# Altium PCB pro.PcbDoc
Units mil, origin at the board's own origin, x right, y up, seen from the top; angles counter-clockwise.
Board outline 6000 x 4000 mil, 2 copper layers (Top, Bottom), stack 12.7 mil thick; 1 components, 0 nets, 14 pads, 0 vias.
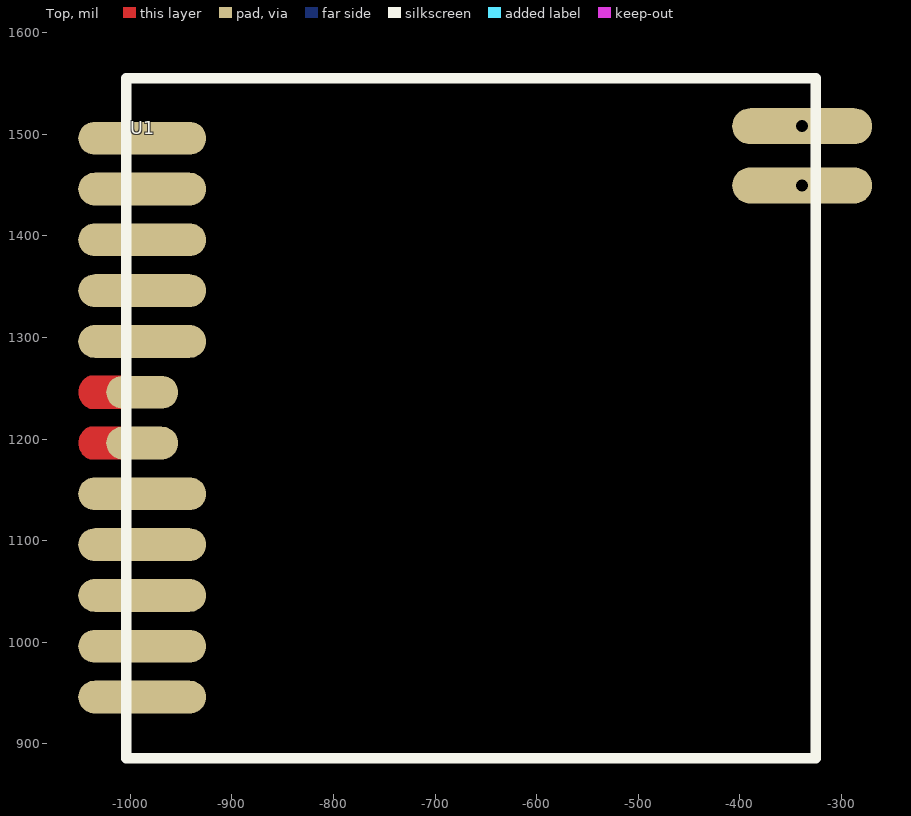
[diagram p0: Top view]
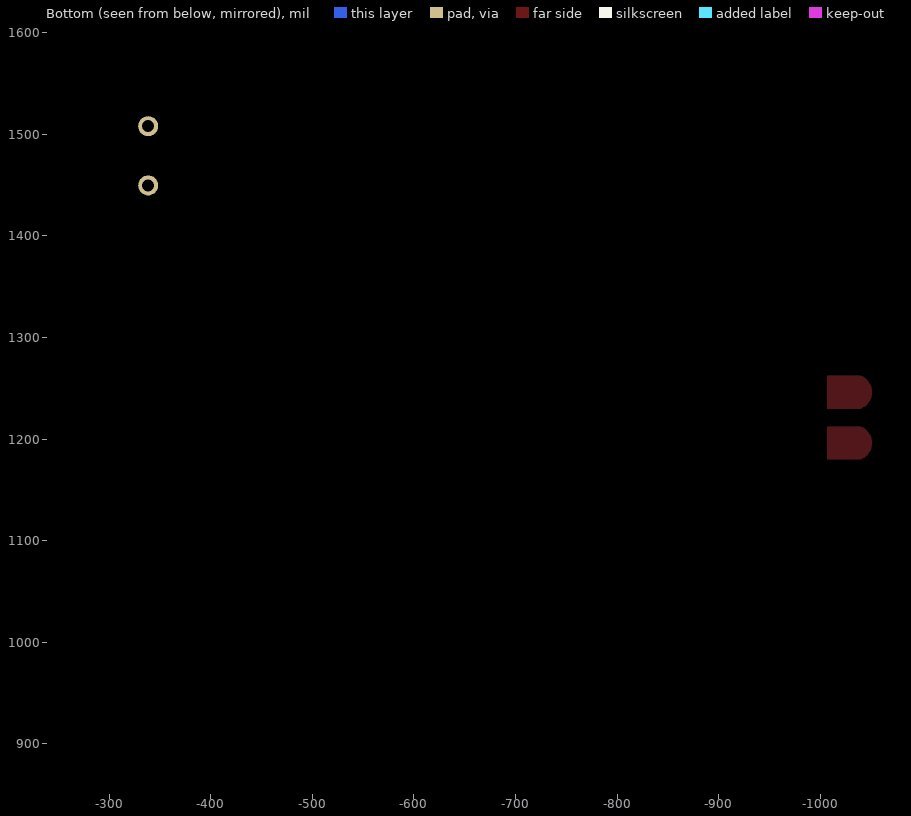
[diagram p1: Bottom view, seen from below]

## Layer stack, top to bottom
Solder Mask Top: solder mask 0.4, Solder Resist, Dk 3.5
Top: signal copper 1.35
Dielectric 1: dielectric 10, FR-4, Dk 4.3
Bottom: signal copper 1.35
Solder Mask Bottom: solder mask 0.4, Solder Resist, Dk 3.5

## Board outline
-9000,-9000 -3000,-9000 -3000,-5000 -9000,-5000

## Design rules (kind name [scope] priority, off if disabled: settings)
Clearance "Clearance - Default - DEFAULT- SMD" [IsVia vs IsSMTPin] p1: gap=6 ignorepadtopadclearanceinfootprint=FALSE
Clearance "Clearance - Default - DEFAULT - Via" [IsVia vs IsVia] p2: gap=6 ignorepadtopadclearanceinfootprint=FALSE
Clearance "Clearance - Default - DEFAULT - Net" [All] p3: gap=6 ignorepadtopadclearanceinfootprint=FALSE except(0: Arc-Hole Track-Hole SMDPad-Hole THPad-Hole Via-Hole Fill-Hole Poly-Hole Region-Hole Text-Hole; 10: Fill-Fill Fill-Poly Fill-Region Poly-Poly Poly-Region Region-Region Text-Text)
ComponentClearance "ComponentClearance - Default - DEFAULT" [All] p1: gap=6 collisioncheckmode=3 verticalgap=10 showdistances=FALSE
FanoutControl Fanout_Small [(CompPinCount < 5)] p3: bgadir=Out bgaviamode=Centered fanoutstyle=Auto fanoutdirection=OutThenIn viagrid=1 // Fanout_Small (Default Rule)
FanoutControl Fanout_SOIC [IsSOIC] p4: bgadir=Out bgaviamode=Centered fanoutstyle=Auto fanoutdirection=Alternating viagrid=1 // Fanout_SOIC (Default Rule)
HoleToHoleClearance "HoleToHoleClearance - Default - DEFAULT" [All] p1: gap=6 allowstackedmicrovias=TRUE
Length "Default Length" [All] p1: maxlimit=50000 minlimit=0
MaxMinImpedance "Default Impedance" [All] p1: minimum=50,00 maximum=150,0
ParallelSegment "Default Parallel Segment Adjasent" [All] p1: limit=1000 gap=200
ParallelSegment "Default Parallel Segment Same Layer" [All] p2: limit=1000 gap=200
PlaneConnect "Default PlaneConnect" [All] p1: planeconnectstyle=Relief reliefexpansion=20 reliefentries=0 reliefconductorwidth=15 reliefairgap=10
PolygonConnect "PolygonConnect - Default SMT" [IsSMTPin] p1: connectstyle=Relief reliefconductorwidth=10 reliefentries=4 polygonreliefangle="45 Angle" airgapwidth=10
PolygonConnect "PolygonConnect - Default Pad" [All] p2: connectstyle=Relief reliefconductorwidth=15 reliefentries=4 polygonreliefangle="45 Angle" airgapwidth=10
RoutingLayers "RoutingLayers - Default - DEFAULT" [All] p1: top layer_v5=TRUE bottom layer_v5=TRUE
RoutingPriority "RoutingPriority - Default - DEFAULT" [All] p1: routingpriority=3
RoutingTopology "Default Routing Topology" [All] p1: topology=Shortest
RoutingVias "RoutingVias - Default - DEFAULT" [All] p1: holewidth=37 width=55 viastyle="Through Hole" minholewidth=37 minwidth=55 maxholewidth=37 maxwidth=55
SMDToCorner "SMDToCorner - Default - DEFAULT" [All] p1: distance=60000
SolderMaskExpansion [All] p1: expansion=4
Width "Default Width" [All] p1: maxlimit=12 minlimit=12 preferedwidth=12
20 further rules are at their usual default settings.

## Components (designator, comment, footprint, x,y, rotation, side; value= is the part's Value field where it differs from the comment)
U1 "RF4432PRO" RF4432PRO -1000,1500 r0 top

## Footprints (in the part's own frame and the unit in brackets; to place one, negate y for a bottom-side part, rotate by r counter-clockwise, add the part's x,y. Pads: shape width x height; smd on the part's side, far side on the other; paste and mask are expansions set on the pad)
RF4432PRO [mm]
  oval 3.2x0.82 smd: 1(0.3,-0.1) 2(0.3,-1.37) 3(0.3,-2.64) 4(0.3,-3.91) 5(0.3,-5.18) 8(0.3,-8.99) 9(0.3,-10.26) 10(0.3,-11.53) 11(0.3,-12.8) 12(0.3,-14.07)
  oval 1.8x0.82 smd: 6(0.3,-6.45) 7(0.3,-7.72)
  oval 3.5x0.9 / inner round 0 / far side round 0.5 hole 0.3: 13(16.8,-1.28) 14(16.8,0.2)
  Top region: -0.17,-7.31 -1.01,-7.31 -1.04,-7.323 -1.069,-7.339 -1.097,-7.356 -1.124,-7.376 -1.149,-7.397 -1.172,-7.42 -1.194,-7.445 -1.213,-7.472 -1.231,-7.5 -1.246,-7.529 -1.259,-7.559 -1.27,-7.59 -1.279,-7.622 -1.285,-7.654 -1.288,-7.687 -1.29,-7.72 -1.288,-7.753 -1.285,-7.786 -1.279,-7.818 -1.27,-7.85 -1.259,-7.881 -1.246,-7.911 -1.231,-7.94 -1.213,-7.968 -1.193,-7.995 -1.172,-8.02 -1.149,-8.043 -1.124,-8.064 -1.097,-8.084 -1.069,-8.102 -1.04,-8.117 -1.01,-8.13 -0.17,-8.13 -0.17,-7.31
  Top region: -0.17,-6.04 -1.01,-6.04 -1.04,-6.053 -1.069,-6.069 -1.097,-6.086 -1.124,-6.106 -1.149,-6.127 -1.172,-6.15 -1.194,-6.175 -1.213,-6.202 -1.231,-6.23 -1.246,-6.259 -1.259,-6.289 -1.27,-6.32 -1.279,-6.352 -1.285,-6.384 -1.288,-6.417 -1.29,-6.45 -1.288,-6.483 -1.285,-6.516 -1.279,-6.548 -1.27,-6.58 -1.259,-6.611 -1.246,-6.641 -1.231,-6.67 -1.213,-6.698 -1.193,-6.725 -1.172,-6.75 -1.149,-6.773 -1.124,-6.794 -1.097,-6.814 -1.069,-6.832 -1.04,-6.847 -1.01,-6.86 -0.17,-6.86 -0.17,-6.04
  silkscreen extent -0.1,-15.6 17.14,1.4

## Nets (pads, with @x,y where several pads share a name; then routed paths per layer and width w, separated by ;. In a path a pad name is that pad's centre, name@x,y a point inside that pad or via, vN(x,y) a via of type N, cw(c..) or ccw(c..) an arc to the next point about the centre after c; other vN are vias at no path point)
pads on no net: U1.1 U1.2 U1.3 U1.4 U1.5 U1.6 U1.7 U1.8 U1.9 U1.10 U1.11 U1.12 U1.13 U1.14